# Altium PCB NODEMCU_DEVKIT_V1.0.PcbDoc
Units mil, origin at the board's own origin, x right, y up, seen from the top; angles counter-clockwise.
Board outline 1000 x 1900 mil, 2 copper layers (Top Layer, Bottom Layer); 24 components, 28 nets, 115 pads, 238 vias.
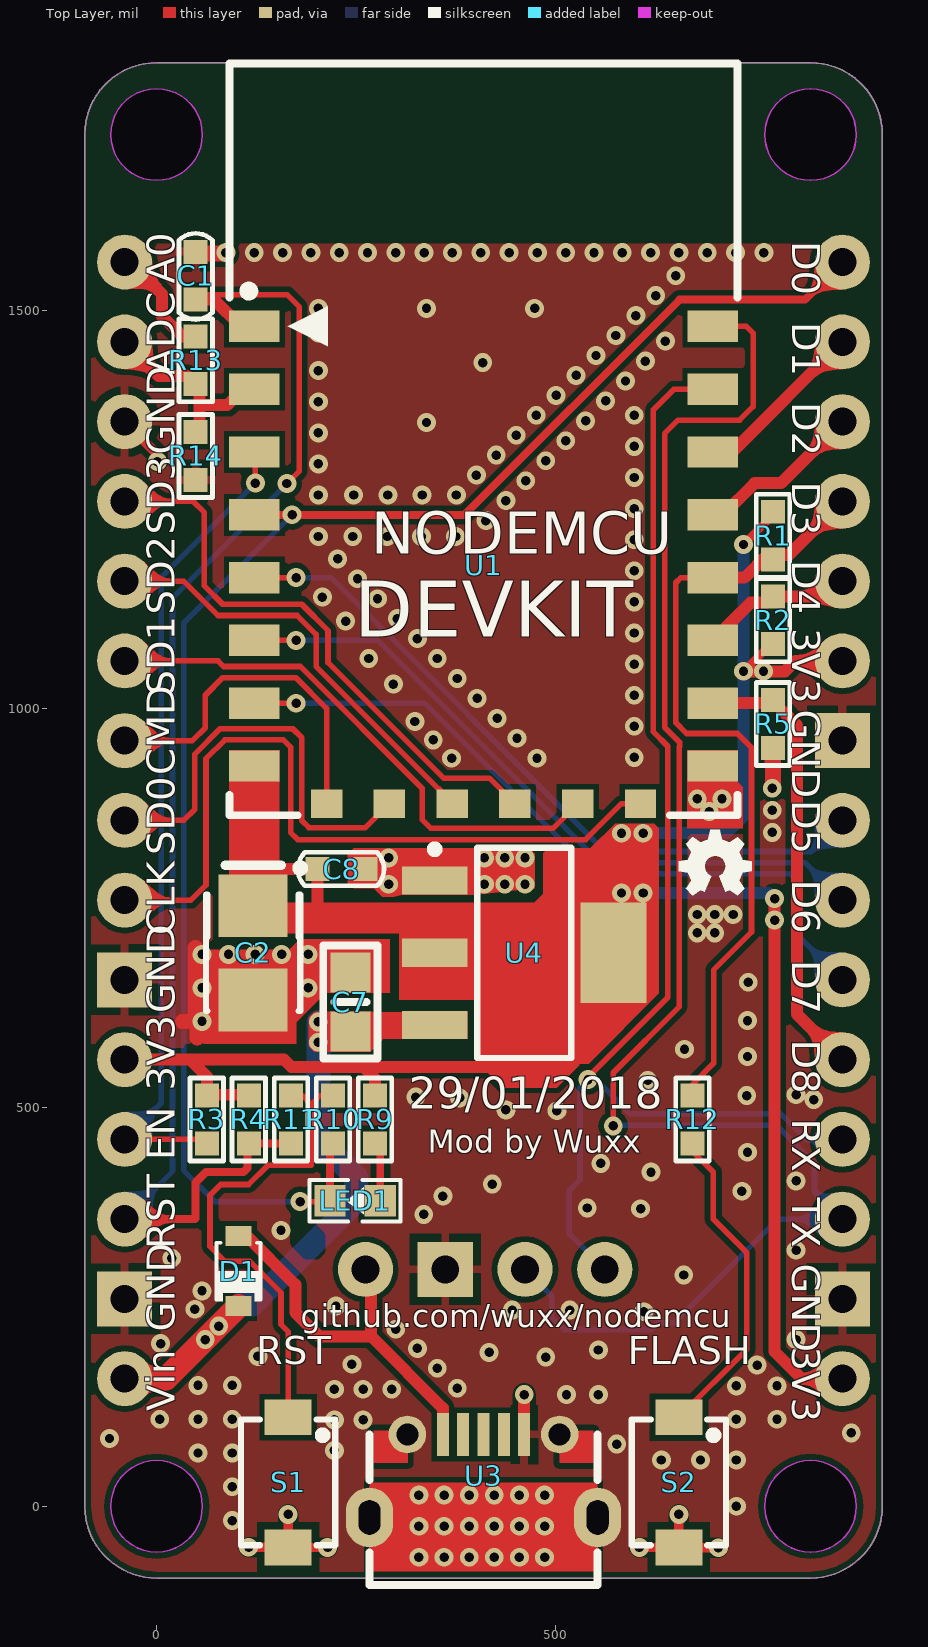
[diagram p0: Top Layer view]
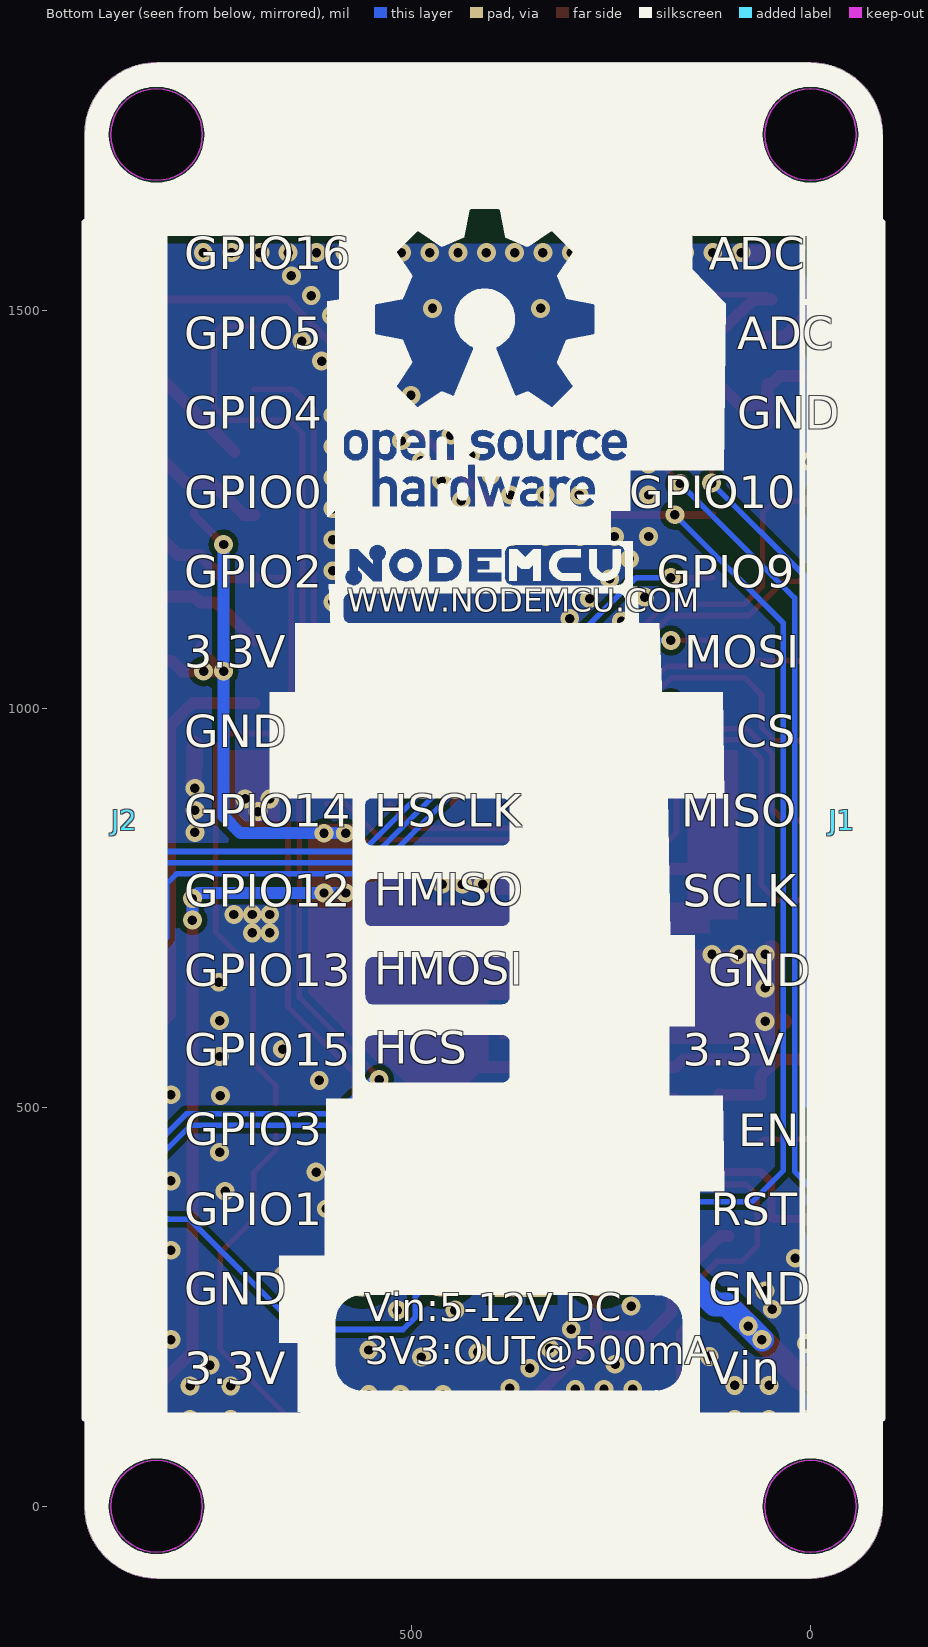
[diagram p1: Bottom Layer view, seen from below]

## Layer stack, top to bottom
Top Solder: solder mask 0.4, Solder Resist, Dk 3.5
Top Layer: signal copper 1.4
Dielectric 1: dielectric 12.6, FR-4, Dk 4.8
Bottom Layer: signal copper 1.4
Bottom Solder: solder mask 0.4, Solder Resist, Dk 3.5

## Board outline
-90,0 -90,1720 cw(c0,1720) 0,1810 820,1810 cw(c820,1720) 910,1720 910,0 cw(c820,0) 820,-90 0,-90 cw(c0,0)

## Design rules (kind name [scope] priority, off if disabled: settings)
Clearance Clearance_Polygon [InNamedPolygon('Bottom Layer-GND') Or InNamedPolygon('Top Layer-GND') vs IsPad] p1: gap=15
Clearance Clearance_Diff [InNet('D_N') vs InNet('D_P')] p2: gap=6
Clearance [All] p3: gap=7
DiffPairsRouting [All] p1: maxlimit=10 minlimit=6 mostfreqgap=6 toplayer_minwidth=6 toplayer_maxwidth=100 toplayer_prefwidth=6 bottomlayer_minwidth=6 bottomlayer_maxwidth=100 bottomlayer_prefwidth=6 maxuncoupledlength=500
HoleSize [All] p1: absolutevalues=TRUE maxlimit=196.85 minlimit=11.81 maxpercent=80.000 minpercent=20.000
PolygonConnect PolygonConnect_USB [InComponent('U3')And IsPadHoleValid] p1: connectstyle=Direct reliefconductorwidth=10 reliefentries=4 polygonreliefangle="90 Angle" airgapwidth=10
PolygonConnect PolygonConnect_Via [IsVia] p2: connectstyle=Direct reliefconductorwidth=10 reliefentries=4 polygonreliefangle="90 Angle" airgapwidth=10
PolygonConnect [All] p3: connectstyle=Relief reliefconductorwidth=10 reliefentries=4 polygonreliefangle="90 Angle" airgapwidth=10
RoutingVias [All] p1 off: holewidth=28 width=50 viastyle="Through Hole" minholewidth=28 minwidth=50 maxholewidth=28 maxwidth=50
SilkToBoardRegionClearance [All] p1 off:
SilkToSilkClearance [All] p1 off: silktosilkclearance=10
SilkToSolderMaskClearance [IsPad] p1 off: minsilkscreentomaskgap=10 clearancetoexposedcopper=TRUE
SolderMaskExpansion [All] p1: expansion=4
Width [All] p1: maxlimit=300 minlimit=7 preferedwidth=10
25 further rules are at their usual default settings.

## Classes and differential pairs
component class 07_ADC: R13 R14
component class 06_KEY: LED1 R9 R10 R11 R12 S1 S2
component class 05_IO_CONN: J1 J2
component class 04_POWER: C7 C8 D1 U4
component class 02_ESP12_CORE: C1 C2 R1 R2 R3 R4 R5 U1
component class 03_USB_TO_UART: U3

## Components (designator, comment, footprint, x,y, rotation, side; value= is the part's Value field where it differs from the comment)
C1 "100nF" SMT_C_0603 49,1543 r90 top
C2 "100uF TAJB107M006RNJ" SMT_C_Tantalum_B 121,694 r270 top
C7 "10uF 25V" SMT_C_0805 243,632.19 r90 top
C8 "10uF" SMT_C_0603 232,799 r0 top
D1 "1N5819/SS14/S4(SOD_323)" SMT_DIODE_SOD_323 103,295 r270 top
J1 "THT_Male_P_1x15" THT_Male_P_1x15-2.54mm#1 -40,1560 r180 bottom locked
J2 "THT_Male_P_1x15" THT_Male_P_1x15-2.54mm#2 860,1560 r180 bottom locked
LED1 "BLUE" SMT_LED_0603 249,383 r180 top
R1 "12k" SMT_R_0603 773,1217 r270 top
R2 "12k" SMT_R_0603 773,1111 r90 top
R3 "12k" SMT_R_0603 63,485 r270 top
R4 "12k" SMT_R_0603 115.75,485 r270 top
R5 "12k" SMT_R_0603 773,981 r90 top
R9 "470" SMT_R_0603 274,485 r90 top
R10 "0(NC)" SMT_R_0603 221.25,485 r270 top
R11 "470" SMT_R_0603 168.5,485 r270 top
R12 "470" SMT_R_0603 672,485 r90 top
R13 "220k(1%)" SMT_R_0603 49,1437 r90 top
R14 "100k(1%)" SMT_R_0603 49,1317 r90 top
S1 "KEY_RST/USER" SMT_SW_PTS_820 165,30 r270 top locked
S2 "KEY_FLASH" SMT_SW_PTS_820 655,30 r270 top locked
U1 "ESP_12_E" ESP_12_E_L 95.04,1479.43 r0 top locked
U3 "USB_Micro_5S_B" USB_MICRO_5S_B 410,90 r180 top locked
U4 "NCP1117ST33T3G" SOT-223 461,694 r180 top

## Footprints (in the part's own frame and the unit in brackets; to place one, negate y for a bottom-side part, rotate by r counter-clockwise, add the part's x,y. Pads: shape width x height; smd on the part's side, far side on the other; paste and mask are expansions set on the pad)
ESP_12_E_L [mm] "ESP-12 Wi-Fi Module by AI-Thinker"
  rect 1.6x1 smd: 1(0.7,0) 2(0.7,-2) 3(0.7,-4) 4(0.7,-6) 5(0.7,-8) 6(0.7,-10) 7(0.7,-12) 8(0.7,-14) 15(15.3,-14) 16(15.3,-12) 17(15.3,-10) 18(15.3,-8) 19(15.3,-6) 20(15.3,-4) 21(15.3,-2) 22(15.3,0)
  rect 1x0.9 smd: 9(3,-15.2) 10(5,-15.2) 11(7,-15.2) 12(9,-15.2) 13(11,-15.2) 14(13,-15.2)
  silkscreen extent -0.08,-15.57 16.08,8.37, body extent 0,-15.49 16,8.51, height 2.75
SMT_C_0603 [mil]
  rect 30x30 smd: 1(-30,0) 2(30,0)
  silkscreen extent -55,-21 53,21, body extent -29,-15 31,15, height 31
SMT_C_0805 [mil] "Surface mount capacitor 0805"
  rect 50x50 smd: 1(-37,0) 2(37,0)
  silkscreen extent -71,-34 71,34, body extent -49,-24 49,25, height 31
SMT_C_Tantalum_B [mm] "Capacitor, SM Tantalum; Body 3.5 x 2.8 mm (LxW typ)"
  rect 2x2.2 smd: 1(-1.5,0) 2(1.5,0)
  silkscreen extent -2.82,-1.5 1.85,1.63, body extent -1.75,-1.4 1.75,1.4, height 1.9
SMT_DIODE_SOD_323 [mm] "SOD-323(0805) Package"
  rect 0.63x0.83 smd: 1(-1.115,0) 2(1.115,0)
  silkscreen extent -0.9,-0.7 0.96,0.7, body extent -1.35,-0.62 1.35,0.62, height 1.1
SMT_LED_0603 [mm] "SMT LED"
  rect 1x1 smd: 1(-0.8,0) 2(0.8,0)
  silkscreen extent -1.45,-0.66 1.45,0.66, body extent -0.81,-0.4 0.81,0.4, height 0.6
SMT_R_0603 [mil]
  rect 30x30 smd: 1(-30,0) 2(30,0)
  silkscreen extent -52,-21 52,21, body extent -29,-15 31,15, height 31
SMT_SW_PTS_820 [mm] "SMT Tactile ?Switch PTS 820 Series"
  rect 1.143x1.5 smd: 1(-2.075,0) 2(2.075,0)
  round 0 all layers, no hole paste-2.54 mask-2.54: MH1(0,0.9) MH2(0,-0.9)
  silkscreen extent -2,-1.5 2,1.5, body extent -2.25,-1.55 2.25,1.55, height 2.05
SOT-223 [mm] "3 LEAD SOT-223 PLASTIC PACKAGE"
  rect 2.1x0.9 smd: 1(2.85,-2.3) 2(2.85,0) 3(2.85,2.3)
  rect 2.1x3.2 smd: 2(-2.85,0)
  silkscreen extent -1.5,-3.42 2.97,3.35, body extent -3.54,-3.25 3.54,3.25, height 1.65
THT_Male_P_1x15-2.54mm#1 [mil] "THT Male pin header strip 1x15 2.54mm pitch"
  round 69 hole 35: 1(0,0) 2(0,-100) 3(0,-200) 4(0,-300) 5(0,-400) 6(0,-500) 7(0,-600) 8(0,-700) 9(0,-800) 11(0,-1000) 12(0,-1100) 13(0,-1200) 15(0,-1400)
  rect 69x69 hole 35: 10(0,-900) 14(0,-1300)
  silkscreen extent -50,-1450 50,50, body extent -57,-1450 57,50, height 335
THT_Male_P_1x15-2.54mm#2 [mil] "THT Male pin header strip 1x15 2.54mm pitch"
  round 69 hole 35: 1(0,0) 2(0,-100) 3(0,-200) 4(0,-300) 5(0,-400) 6(0,-500) 8(0,-700) 9(0,-800) 10(0,-900) 11(0,-1000) 12(0,-1100) 13(0,-1200) 15(0,-1400)
  rect 69x69 hole 35: 7(0,-600) 14(0,-1300)
  silkscreen extent -50,-1450 50,50, body extent -57,-1450 57,50, height 335
USB_MICRO_5S_B [mil] "USB Micro SMT 5S B"
  rect 15x54 smd: 1(51,0) 2(25.5,0) 3(0,0) 4(-25.5,0) 5(-51,0)
  oval 59.06x74.8 hole 27.56 slot 43.31 at 90 deg: 6(-143,104) 7(143,104)
  round 47.24 hole 27.5: 8(95.5,0) 9(-95.5,0)
  silkscreen extent -143,0 143,189, body extent -161,-9 161,204, height 105

## Part data
C1 C8: library part SMT_C_0402, "Surface mount capacitor 0402"
C2: library part SMT_C_Tantalum_B, "Capacitor, SM Tantalum; Body 3.5 x 2.8 mm (LxW typ)"
C7: library part SMT_C_0805, "Surface mount capacitor 0805"
D1: library part SMT_DIODE_SCHOTTKY_SOD_323, "Surface mount schottky diode SOD-323(0805) Package"
J1 J2: "THT Male pin header strip 1x15"
LED1: library part SMT_LED_0603, "SMT LED"
R1 R2 R3 R4 R5 R9 R10 R11 R12 R13 R14: library part SMT_R_0402, "Surface mount resistor 0402"
S1 S2: library part SMT_SW_PTS_820, "SMT Tactile ?Switch PTS 820 Series"
U1: "ESP-12 Wi-Fi Module by AI-Thinker"
U3: "USB micro female SMT with 4 fixed foot"
U4: library part NCP1117, "NCP1117, NCV1117. 1.0 A Low-Dropout Positive  Fixed and Adjustable  Voltage Regulators"

## Free pads (board coordinates)
  round 115 hole 115 unplated paste-300 mask-300: 0(0,0) 0(0,1720) 0(820,0) 0(820,1720)
  rect 69x69 hole 35: 0(362,297)
  round 69 hole 35: 1(262,297) 1(462,297) 1(562,297)

## Via types
v1: diameter 23.62, hole 11.81, Top Layer to Bottom Layer, tented both sides, 238 vias

## Nets (pads, with @x,y where several pads share a name; then routed paths per layer and width w, separated by ;. In a path a pad name is that pad's centre, name@x,y a point inside that pad or via, vN(x,y) a via of type N, cw(c..) or ccw(c..) an arc to the next point about the centre after c; other vN are vias at no path point)
ADC: J1.2 R13.1 R14.2 U1.2 | length 234.8
  Top Layer w15: J1.2 2.69,1417.31 38.69,1417.31 R13.1 ; R14.2@54,1357 R13.1@54,1407 ; 57,1380.66 88.66,1380.66 108.68,1400.69 U1.2
ADC_EX: J1.1 R13.2 | length 150.9
  Top Layer w15: J1.1 -33,1560 7,1520 7,1492 32,1467 R13.2 R13.2@56,1467
EN: J1.12 R3.2 U1.3 | length 1033.1
  Top Layer w7: J1.12 59,460 R3.2@63,456 ; v1(124,1283) U1.3@124,1320.54
  Bottom Layer w7: J1.12 6,506 6,1165 v1(124,1283)
GND: C1.2 C2.2 C7.2 C8.2 J1.3 J1.10 J1.14 J2.7 J2.14 pad.0@362,297 R5.1 R14.1 S1.2 S2.2 U1.15 U3.5 U3.6 U3.7 U3.8 U3.9 U4.1 | length 785.7
  Top Layer w11.81: J1.3 1,1319 v1(1,1310) ; v1(115.47,-51.39) S1.2@165,-51.39 ; v1(165,-10.17) S1.2 v1(214.53,-51.69) ; v1(605.47,-51.69) S2.2 v1(655,-10.17) ; S2.2@655,-52 v1(704.53,-52) ; v1(678,887) U1.15@678,927 ; v1(693,871) 693,923.84 U1.15 ; v1(709,887) U1.15@709,927
  Top Layer w15: U3.5 v1(461,140)
  Top Layer w20: J1.10 J1.10@-29,649 ; 33,608 36,608 ; v1@49,700 49,616 v1(57,608) 51,602 51,588 ; C1.2@54,1571 v1@87,1571 ; v1(772,900.33) 773,901.33 R5.1 ; 772,928 R5.1@772,956
  other v1: 329,-64 360.5,-64 392,-64 423.5,-64 455,-64 486.5,-64 329,-25 360.5,-25 392,-25 423.5,-25 455,-25 486.5,-25 95,-18 727,0 329,14 360.5,14 392,14 423.5,14 455,14 486.5,14 95,24.4 633,58 682,58 727,58 52,66.8 95,66.8 223,70 577,78 -59,85 871,92 223,108.33 259,108.33 4,109.2 52,109.2 95,109.2 727,109.2 778,109.2 514,140 554,140 223,146.67 259,146.67 295,146.67 377,148 727,151 778,151 52,151.6 95,151.6 352,173 753,177 245,178 488,187 127,188 417,193 554,196 327,198 5,204 802,209 300,222 611,244 446,246 518,246 48,247 225,251 57,270 661,290 19,311 802,321 156,346 335,366 607,373 540,374 359,389 734,395 421,404 802,408 620,419 557,430 741,444 502,496 438,497 824,510 380,512 325,513 740,515 802,516 616,534 741,564 662,573 741,609 57,650 190,650 742,657 57,692 90.25,692 123.5,692 156.75,692 190,692 678,719 700,719 678,742 700,742 723,742 291,780 411,780 436.5,780 462,780 291,813 411,813 436.5,813 462,813 772,845 772,872.67 370,938 477,938 599,939 347,961 452,963 599,978 324,984 427,988 402,1013 599,1017 297,1031 377,1038 599,1056 266,1063 352,1063 327,1088 599,1095 237,1110 302,1113 599,1134 277,1138 208,1140 252,1163 599,1173 227,1188 599,1212 203,1216 246,1216 289,1216 332,1216 375,1216 413,1236 599,1251 438,1261 203,1268 247,1268 290,1268 333,1268 376,1268 463,1286 599,1290 401,1293 203,1307 488,1311 426,1318 599,1329 513,1336 451,1343 203,1346 338.5,1359 538,1361 476,1368 599,1368 203,1385 563,1386 501,1393 588,1411 526,1418 203,1424 409,1434 613,1436 551,1443 638,1461 576,1468 203,1471 601,1493 203,1502 338.5,1502 474,1502 626,1518 651,1543 87,1572 122.5,1572 158,1572 193.5,1572 229,1572 264.5,1572 300,1572 335.5,1572 371,1572 406.5,1572 442,1572 477.5,1572 513,1572 548.5,1572 584,1572 619.5,1572 655,1572 690.5,1572 726,1572 761.5,1572
GPIO0: J2.4 R1.2 R12.2 U1.18 | length 1011.8
  Top Layer w7: R12.2@670.75,505.24 670.75,527.75 698.53,555.53 698.53,672.47 746,719.93 746,951.15 728.15,969 664.6,969 651,982.6 651,1158 657.46,1164.46 U1.18
  Top Layer w15: U1.18 737.46,1164.46 766,1193 793,1193 J2.4
GPIO2: J2.5 R2.2 U1.17 | length 193.4
  Top Layer w15: U1.17 744.68,1133 765,1133 R2.2 841,1141 J2.5
GPIO4: J2.3 U1.19 | length 211
  Top Layer w15: U1.19 710.2,1243.2 750,1283 783,1283 J2.3
GPIO5: J2.2 U1.20 | length 195.2
  Top Layer w15: U1.20@721.94,1321.94 J2.2
GPIO9: J1.5 U1.11 | length 551
  Top Layer w7: J1.5 34,1160 77,1117 176.2,1117 200,1093.2 200,1053.2 354.2,899 355,899 370.63,883.37 U1.11
GPIO10: J1.4 U1.12 | length 723.7
  Top Layer w7: J1.4 46,1260 60,1246 60,1154 83,1131 182,1131 215,1098 215,1058 360,913 417.37,913 U1.12
GPIO12: J2.9 U1.6 | length 872.3
  Top Layer w7: U1.6 v1(175,1085.72)
  Bottom Layer w7: v1(175,1085.72) 277.48,1085.72 556.2,807 813,807 J2.9
GPIO13: J2.10 U1.7 | length 921
  Top Layer w7: U1.7 v1(175,1006.98)
  Bottom Layer w7: v1(175,1006.98) 336.02,1006.98 550,793 795,793 807,781 807,713 J2.10
GPIO14: J2.8 U1.5 | length 895.8
  Top Layer w7: U1.5 v1(175,1164.46)
  Bottom Layer w7: v1(175,1164.46) 218.54,1164.46 562,821 821,821 J2.8
GPIO15: J2.11 R5.2 U1.16 | length 559.8
  Top Layer w15: U1.16 775.02,1006.98 803,979 803,617 J2.11
GPIO16: J2.1 LED1.2 R10.2 U1.4 | length 2019.4
  Top Layer w7: v1(180,382) LED1.2@216.5,382 ; R10.2@217.5,451.25 R10.2
  Top Layer w10: U1.4 v1(170,1243.2) 386.2,1243.2 656,1513 813,1513 J2.1 ; LED1.2 R10.2@217.5,451.25
  Bottom Layer w7: v1(170,1243.2) 34,1107.2 34,421 73,382 v1(180,382)
NetLED1_1: LED1.1 R9.1 | length 74.7
  Top Layer w10: R9.1 280.5,448.5 LED1.1
NetR10_1: R10.1 R11.1 S1.1 | length 617.8
  Top Layer w7: S1.1 165,219 156,228 156,268 117,307 86,307 67,326 67,390 80.5,403.5 115.42,403.5 139.5,427.58 193.83,427.58 193.83,435.48 194,435.65 194,504 ; R11.1 183,515 194,504 ; R10.1 205,515 194,504
NetR12_1: R12.1 S2.1 | length 417.4
  Top Layer w7: S2.1 740,196.69 740,318 698,360 698,419 670.75,446.25 R12.1@670.75,465.24
NRST: C1.1 J1.13 R4.2 R11.2 U1.1 | length 1756.1
  Top Layer w7: C1.1 55,1519 164,1519 179,1504 179,1298 v1(163.5,1282.5)
  Top Layer w10: J1.13 48,360 49,361 49,406 62,419 109,419 114,424 114,457 116,455 R11.2
  Top Layer w15: C1.1 72,1513 105.57,1479.43 U1.1
  Bottom Layer w7: J1.13 20,420 20,1139 v1(163.5,1282.5)
RXD0: J2.12 pad.1@562,297 U1.21 | length 1587.9
  Top Layer w7: v1@540.37,537.37 641,638 641,953 623,971 623,1375 648.68,1400.69 U1.21
  Bottom Layer w7: pad.1@562,297 517.69,341.31 517.69,396.31 531,409.62 531,525 v1(541,535) 551,535 594,492 782.8,492 814.8,460 J2.12
SPI_CLK: J1.9 U1.14 | length 956
  Top Layer w7: J1.9 43,760 62,779 62,937.4 85.6,961 159,961 168,952 168,845 177,836 538,836 583,881 U1.14
SPI_INT: J1.6 U1.13 | length 691
  Top Layer w7: J1.6 77,1060 84,1053 180.34,1053 333,900.34 333,861 344,850 497.11,850 U1.13
SPI_MISO: J1.8 U1.10 | length 544.7
  Top Layer w7: J1.8 34,860 48,874 48,943.2 79.8,975 170.8,975 182,963.8 182,859.9 190.9,851 261.89,851 U1.10
SPI_MOSI: J1.7 U1.9 | length 445.3
  Top Layer w7: J1.7 45,960 61,976 61,1017 83,1039 174.54,1039 213.15,1000.39 U1.9
TXD0: J2.13 pad.1@462,297 U1.22 | length 2040
  Top Layer w7: v1(572.63,477) 572.63,543.63 655.21,626.21 655.21,952.35 656,953.14 656,957.8 637,976.8 637,1345 654,1362 731,1362 748,1379 748,1471 739.57,1479.43 U1.22
  Bottom Layer w7: pad.1@462,297 495.69,263.31 495.69,236.76 510.76,221.69 620.24,221.69 628.55,230 649,230 779,360 J2.13 825,395 825,430 777,478 v1@573,478
VDD3V3: C2.1 C8.1 J1.11 J2.6 J2.15 R1.1 R2.1 R3.1 R4.1 R9.2 U1.8 U4.2 | length 2894.3
  Top Layer w10: 450,530 485,565 485,665 ; v1(736,1047) 766,1077 R2.1@766,1079.5 ; v1(736,1206) 773,1243 R1.1
  Top Layer w15: J1.11 42,560 ; R4.1@114,517 113,516 63,516 63,539 42,560 ; 135,801 137,799 C8.1 202,737 ; R9.2 274,536 259,551 ; 464,671 464,574 441,551 259,551 ; 507,768 v1(583,844) v1(610,844) ; 528,747 528,758 539,769 v1(583,769) v1(610,769) ; v1(736,1047) v1(761,1047) 788,1047 801,1060 J2.6 ; v1(775,762) v1(775,735) 775,194 809,160 J2.15 ; 42,560 160,560 169,551 259,551
  Bottom Layer w15: v1(583,769) v1(610,769) 768,769 v1(775,762) v1(775,735) ; v1(583,844) v1(610,844) 715,844 736,865 v1(736,1047) v1(736,1206)
VDD5V: C7.1 D1.2 J1.15 U4.3 | length 685.7
  Top Layer w30: J1.15 11.9,160 D1.2
  Bottom Layer w30: v1(61,209) 105.12,253.12 120.12,253.12 250,383 250,413 202.81,460.19 v1(202.81,581.81) v1(202.81,607.39)
  other v1: 78,226
VDDUSB: D1.1 pad.1@262,297 U3.1 | length 485.8
  Top Layer w15: D1.1 113.1,338.9 174,278 174,243 204,213 269,213 ; pad.1@262,297 269,290 269,213 ; U3.1 359,123 269,213
pads on no net: S1.MH1 S1.MH2 S2.MH1 S2.MH2 U3.2 U3.3 U3.4

## Polygon pours and split planes (outlines as drawn)
GND on Bottom Layer "Bottom Layer-GND" (solid, remove dead copper, pour order 4): -90,1583 -90,-90 910,-90 910,1583
GND on Top Layer "Top-GND" (solid, remove dead copper, pour order 8): 59,580 -92,580 -90,580 -90,727 60,727 60,581 59,580
GND on Top Layer "Top-GND" (solid, remove dead copper, pour order 19): -90,1583 910,1583 910,-90 -90,-90 -90,1583

## Keep-outs
Keep-Out Layer:
  circle w2: c0,1720 r57.5
  circle w2: c820,1720 r57.5
  circle w2: c820,0 r57.5
  circle w2: c0,0 r57.5
  lines w2: 680,1810 820,1810 ; 820,1810 cw(c820,1720) 910,1720 910,0 cw(c820,0) 820,-90 0,-90 cw(c0,0) -90,0 -90,1720 cw(c0,1720) 0,1810 820,1810

## Other copper
Top Layer:
  rectangle net GND: 267,-82 553,30
  rectangle net GND: 272,54 315,95
  rectangle net GND: 505,54 548,95
  rectangle net VDD3V3: 91,736 154,948
  rectangle net VDD5V: 219,586 390,620
  rectangle net VDD3V3: 304,635 615,753
  rectangle net VDD3V3: 126,718 492,757
  region net GND: 665.71,948 665.71,850 735.29,850 735.29,901.71 728,909 729,910 729,948
  region net GND: 247,775 240,782 240,817.86 247.14,825 467,825 474,818 474,775 401,767 308,767 298,764 283,764 272.55,775
  pour cut-out: 184.41,615.73 213.22,644.54 292.46,644.54 292.46,710.86 292.59,711 303,711 303,621 302,620 198,620
  region net GND: 51,698 166.44,698 179.31,710.86 292.46,710.86 292.46,644.54 293,644 212,644 175,607 175,580 59,580 51,588
  region net VDD5V: 268,570 198,570 191,577 191,613 198,620 270.75,620 285.77,587.77
  region net VDD3V3: 470,753 485,768 485,819 491,825 544,825 575,856 624,856 630,850 630,643 542,555 530,555 530,553 502,525 434,525 404,555 404,753

## Silkscreen, mask and mechanical layers (free items; w line width, h text height)
Top Overlay:
  region: 706.37,848.13 706.51,847.79 706.5,847.79 708.6,836.81 708.74,836.47 708.97,836.38 718.16,832.57 718.38,832.48 718.72,832.62 718.71,832.63 727.96,838.9 728.3,839.04 728.75,838.86 728.72,838.82 736.66,830.95 736.85,830.5 736.71,830.16 736.7,830.17 730.42,820.92 730.29,820.58 730.38,820.35 734.19,811.16 734.28,810.94 734.62,810.8 734.62,810.81 745.59,808.7 745.93,808.56 746.12,808.11 746.07,808.11 746.12,796.93 745.93,796.48 745.59,796.34 745.59,796.35 734.62,794.25 734.28,794.11 734.19,793.88 730.38,784.69 730.29,784.46 730.42,784.13 730.43,784.13 736.71,774.88 736.85,774.55 736.66,774.09 736.62,774.13 728.75,766.19 728.3,766 727.96,766.14 727.97,766.15 718.72,772.42 718.38,772.56 718.16,772.47 713.95,770.72 713.72,770.63 713.27,770.82 713.18,771.05 705.43,790.02 705.34,790.25 705.52,790.7 705.73,790.78 705.8,790.63 709.64,793.2 712.5,797.48 713.5,802.52 712.5,807.56 709.64,811.84 705.37,814.69 700.33,815.7 695.28,814.69 691.01,811.84 688.15,807.56 687.15,802.52 688.15,797.48 691.01,793.2 694.85,790.63 694.92,790.78 695.13,790.7 695.31,790.25 695.22,790.02 687.47,771.05 687.38,770.82 686.93,770.63 686.7,770.72 682.49,772.47 682.27,772.56 681.93,772.42 681.94,772.41 672.69,766.14 672.35,766 671.9,766.19 671.93,766.22 663.99,774.09 663.8,774.55 663.94,774.88 663.95,774.88 670.23,784.13 670.37,784.46 670.27,784.69 666.46,793.88 666.37,794.11 666.03,794.25 666.03,794.23 655.06,796.34 654.72,796.48 654.53,796.93 654.58,796.93 654.53,808.11 654.72,808.56 655.06,808.7 655.06,808.69 666.03,810.8 666.37,810.94 666.46,811.16 666.47,811.16 670.27,820.35 670.37,820.58 670.23,820.92 670.22,820.91 663.94,830.16 663.8,830.5 663.99,830.95 664.03,830.91 671.9,838.86 672.35,839.04 672.69,838.9 672.68,838.89 681.93,832.62 682.27,832.48 682.49,832.57 691.68,836.38 691.91,836.47 692.05,836.81 692.04,836.82 694.14,847.79 694.28,848.13 694.73,848.31 694.73,848.27 705.92,848.31
  text "D0" at 785,1586 h60 r270
  text "A0" at 35,1533 h60 r90
  text "D1" at 785,1484.65 h60 r270
  text "ADC" at 35,1419 h60 r90
  text "D2" at 785,1384.42 h60 r270
  text "GND" at 35,1318.57 h60 r90
  text "D3" at 785,1284.42 h60 r270
  text "SD3" at 35,1218.14 h60 r90
  text "D4" at 785,1186 h60 r270
  text "NODEMCU" at 269,1177 h90
  text "SD2" at 35,1117.71 h60 r90
  text "3V3" at 785,1100.99 h60 r270
  text "DEVKIT" at 248,1067 h120
  text "SD1" at 35,1017.29 h60 r90
  text "GND" at 785,999 h60 r270
  text "CMD" at 35,916.86 h60 r90
  text "D5" at 785,885 h60 r270
  text "SD0" at 35,816.43 h60 r90
  text "D6" at 785,785.88 h60 r270
  text "CLK" at 35,716 h60 r90
  text "D7" at 785,684.77 h60 r270
  text "GND" at 35,618 h60 r90
  text "D8" at 785,584.89 h60 r270
  text "3V3" at 35,521 h60 r90
  text "RX" at 785,485.94 h60 r270
  text "29/01/2018" at 316,485 h69
  text "EN" at 35,434 h60 r90
  text "Mod by Wuxx" at 340,434 h49
  text "TX" at 785,387 h60 r270
  text "RST" at 35,322 h60 r90
  text "GND" at 785,303.8 h60 r270
  text "GND" at 35,219 h60 r90
  text "github.com/wuxx/nodemcu" at 180.71,215.39 h49
  text "3V3" at 785,200 h60 r270
  text "RST" at 125,166 h60
  text "FLASH" at 591,166 h60
  text "Vin" at 35,119 h60 r90
Bottom Overlay:
  drawing of 70 lines, arcs and shapes, not listed
  text "ADC" at 127.69,1537 h70
  text "GPIO16" at 785,1537.14 h70
  text "GPIO5" at 785,1437.27 h70
  text "ADC" at 92.18,1437.13 h70
  text "GND" at 92.18,1337.27 h70
  text "GPIO4" at 785,1337.4 h70
  text "GPIO10" at 227,1237.54 h70
  text "GPIO0" at 785,1237.54 h70
  text "GPIO9" at 192.65,1137.67 h70
  text "GPIO2" at 785,1137.67 h70
  text "WWW.NODEMCU.COM" at 581,1112 h49
  text "MOSI" at 158.56,1037.8 h70
  text "3.3V" at 785,1037.8 h70
  text "CS" at 92.93,937.94 h70
  text "GND" at 785,937.94 h70
  text "MISO" at 161.84,838.07 h70
  text "HSCLK" at 547,838 h70
  text "GPIO14" at 785,838.07 h70
  text "SCLK" at 160.27,738.2 h70
  text "HMISO" at 547,739 h70
  text "GPIO12" at 785,738.2 h70
  text "HMOSI" at 547,640 h70
  text "GND" at 128.44,638.33 h70
  text "GPIO13" at 785,638.33 h70
  text "HCS" at 547,541 h70
  text "3.3V" at 160.07,538.47 h70
  text "GPIO15" at 785,538.47 h70
  text "GPIO3" at 785,438.6 h70
  text "EN" at 90.54,437.92 h70
  text "RST" at 125.3,338.73 h70
  text "GPIO1" at 785,338.73 h70
  text "GND" at 128.44,238.87 h70
  text "GND" at 785,238.87 h70
  text "Vin:5-12V DC" at 559,220 h60
  text "3V3:OUT@500mA" at 558.94,166 h60
  text "Vin" at 127.35,139 h70
  text "3.3V" at 785,139 h70
Top Paste:
  region: 552,23 523,23 523,-52 552,-52
  rectangle: 268,-52 297,23
  rectangle: 453.6,-80 478.6,-51
  rectangle: 416.2,-80 441.2,-51
  rectangle: 378.8,-80 403.8,-51
  rectangle: 341.4,-80 366.4,-51
  rectangle: 304,-80 329,-51
  rectangle: 491,-80 516,-51
  rectangle: 453.6,-35.5 478.6,-6.5
  rectangle: 453.6,9 478.6,25
  rectangle: 416.2,-35.5 441.2,-6.5
  rectangle: 416.2,9 441.2,25
  rectangle: 378.8,-35.5 403.8,-6.5
  rectangle: 341.4,-35.5 366.4,-6.5
  rectangle: 304,-35.5 329,-6.5
  rectangle: 491,-35.5 516,-6.5
  rectangle: 491,9 516,25
  rectangle: 304,9 329,25
  rectangle: 341.4,9 366.4,25
  rectangle: 378.8,9 403.8,25
  rectangle: 275,57 312,92
  region: 545,92 508,92 508,57 545,57
Top Solder:
  rectangle: 267,-55 553,27
  rectangle: 304,-90 516,30
  rectangle: 272,54 315,95
  region: 548,95 505,95 505,54 548,54
Mechanical 15:
  text "2.5400x4.8260cm" at -81,-191 h60
Drill Drawing:
  text ".Legend" at 1187,-214 h60

## Text inside footprints (layer, text, board x,y; h text height)
U1: Mechanical 13 "ANTENNA AREA" at 154.04,1787.43 h10; Mechanical 13 "CUTOUT POLYGON" at 154.04,1767.43 h10